# Altium PCB main.PcbDoc (part 2 of 16)
Units mil, origin at the board's own origin, x right, y up, seen from the top; angles counter-clockwise.
Board outline 8394.75 x 5164.44 mil, 7 copper layers (Top Layer 1, Layer 2, Layer 3, Unused, Layer 4_pow, Layer 5_gnd, Bottom 6+gnd), stack 64.043 mil thick; 364 components, 409 nets, 1932 pads, 1061 vias.
Unrouted connection lines stored in the file: 2.
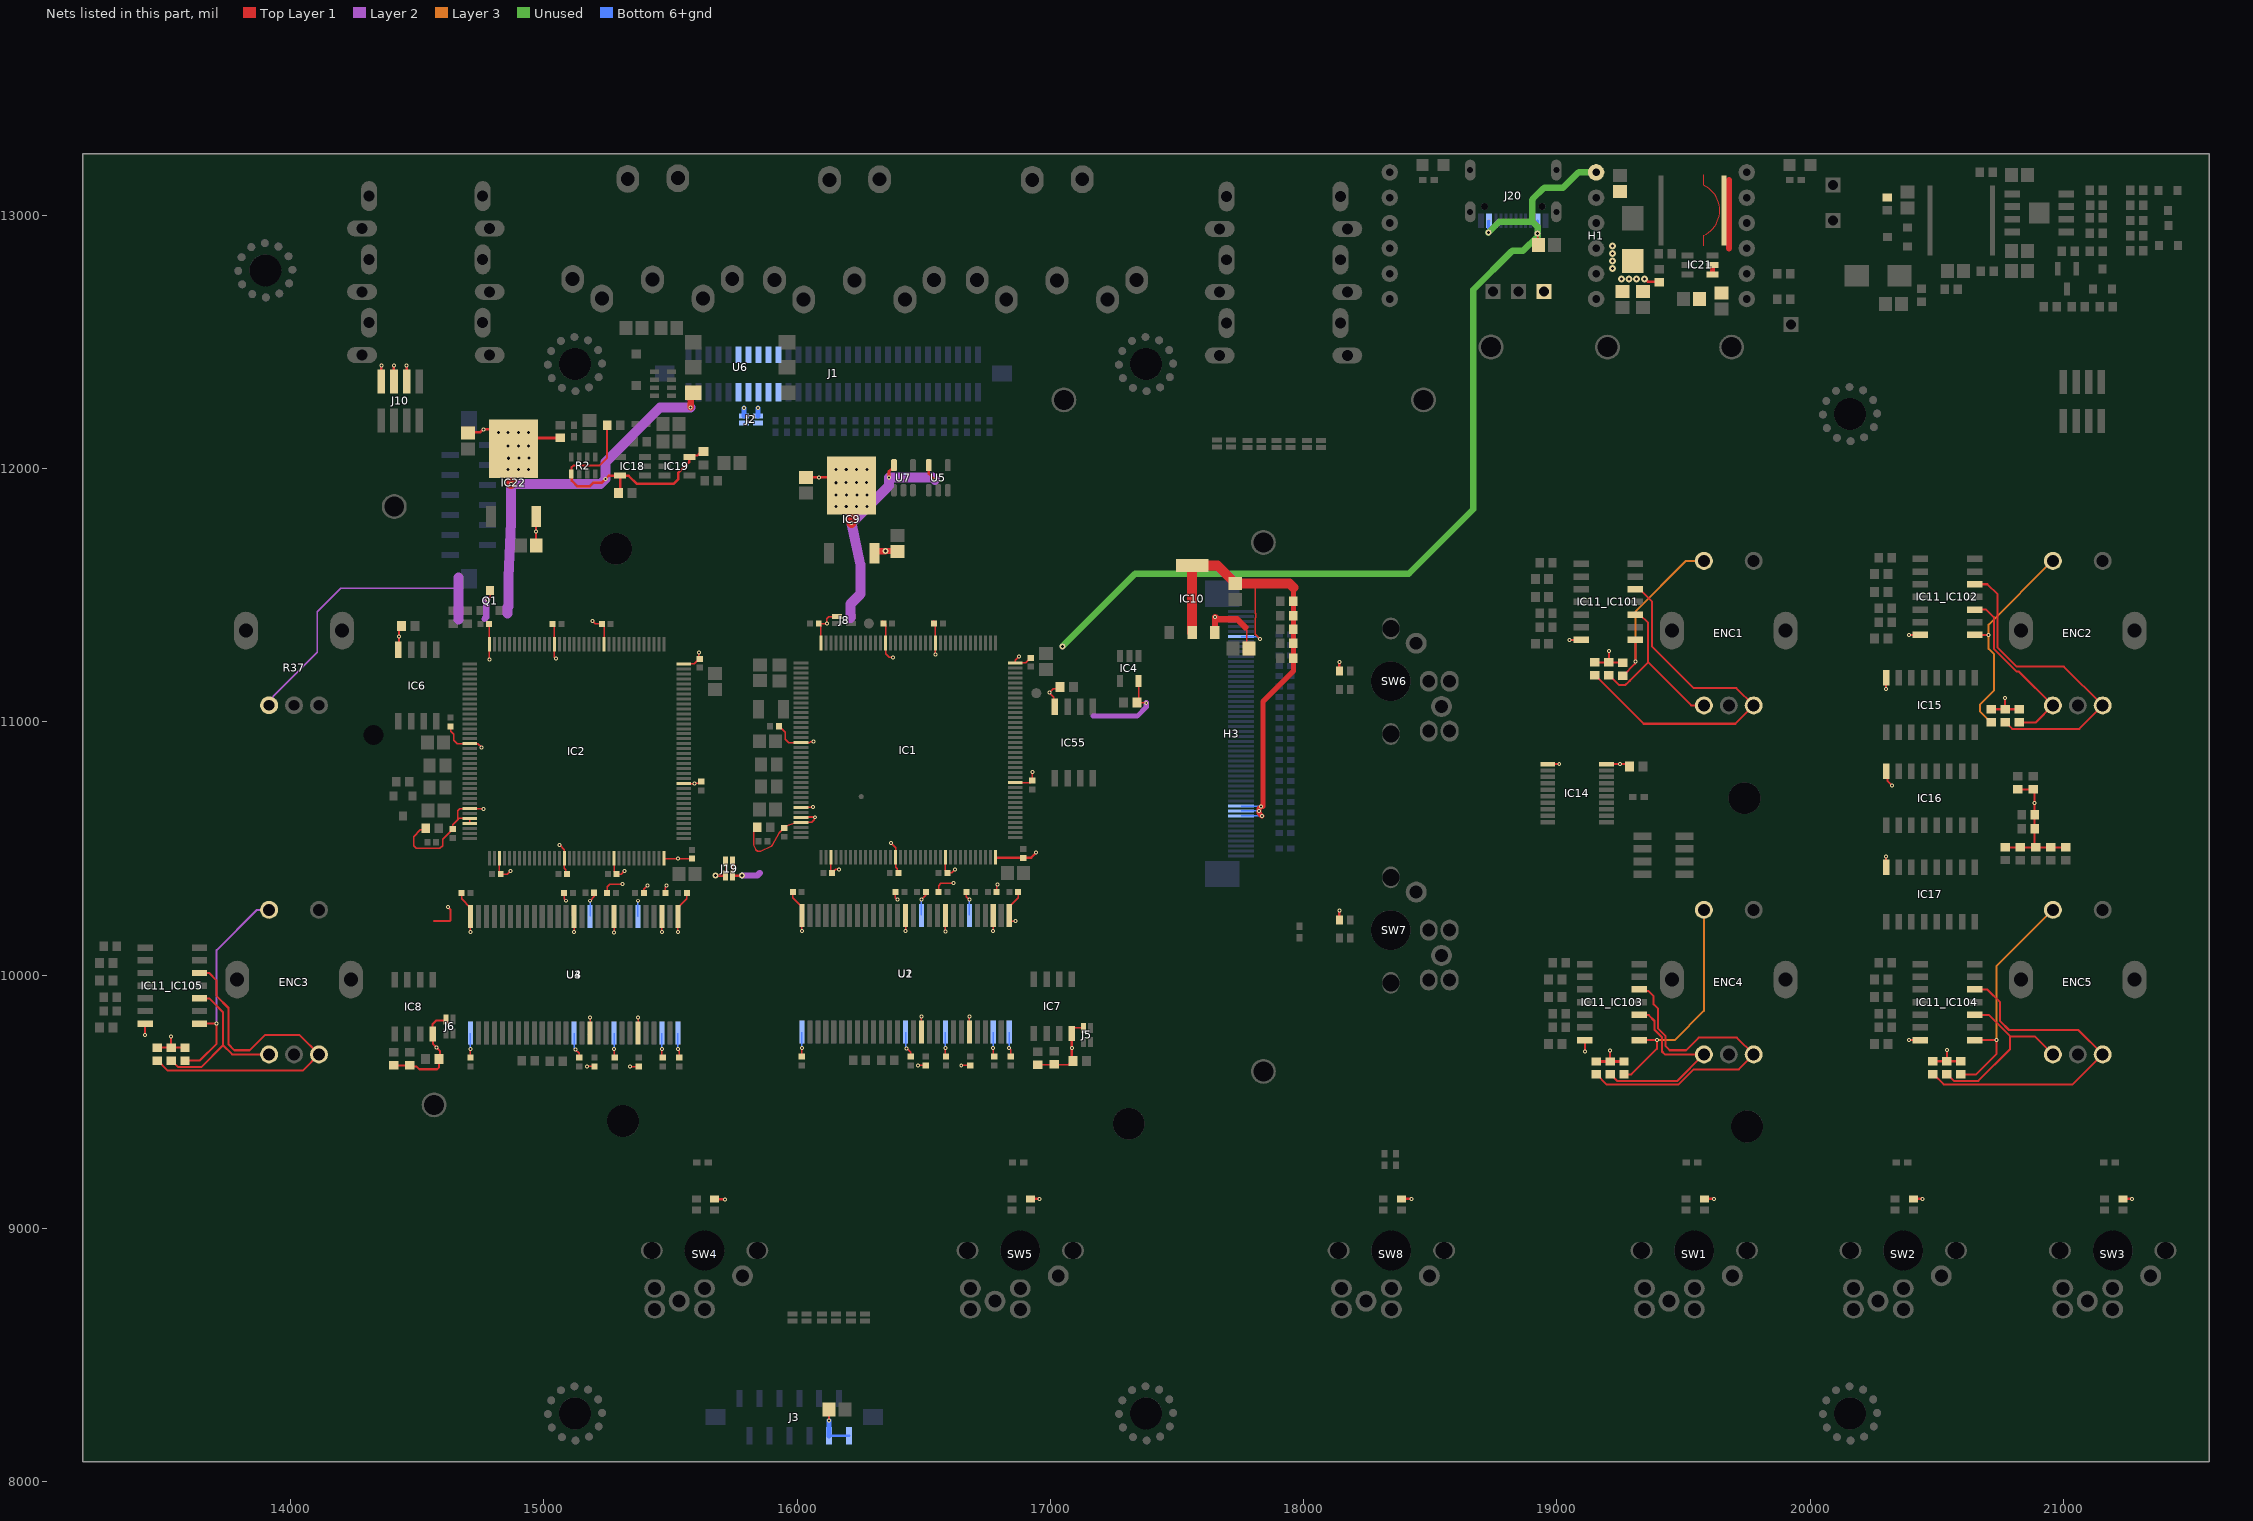
[diagram p6: the nets of this part, all layers, seen from the top]

## Part data
C1 C2 C9 C10: library part C0805C225K8RAC7800, "CAP CER 2.2UF 10V X7R 0805", Device Package="0805 (2012 Metric)", Manufacturer=KEMET, Operating Temperature="-55°C ~ 125°C", Supplier Part Number 1=399-C0805C225K8RAC7800CT-ND, Temperature Coefficient=X7R, Tolerance=±10%, Voltage - Rated=10V, Applications="Bypass, Decoupling", Capacitance="2.2 µF", ComponentLink1Description=Datasheet, ComponentLink1URL=https://api.kemet.com/component-edge/download/datasheet/C0805C225K8RACTU.pdf, ComponentLink2Description="DigiKey Link", ComponentLink2URL=https://www.digikey.com/en/products/detail/kemet/C0805C225K8RAC7800/789654, LastUpdated="3/27/2023 7:09:32 PM", Lifecycle Status=Active, Minimum Order=1, Mounting Type="Surface Mount, MLCC", Package / Case="0805 (2012 Metric)", Packaging=TapeAndReel, Part Number=C0805C225K8RAC7800, Part Status=Active, PartId=32363, Price=0.03, Series="SMD Comm X7R", Size / Dimension="0.079\" L x 0.049\" W (2.00mm x 1.25mm)", Supplier 1=DigiKey, Thickness (Max)="0.055\" (1.40mm)"
C3 C4 C5 C6: library part CBR08C909CAGAC, "CAP CER 9PF 250V C0G/NP0 0805", Device Package="0805 (2012 Metric)", Manufacturer=KEMET, Operating Temperature="-55°C ~ 125°C", Supplier Part Number 1=399-8711-1-ND, Temperature Coefficient="C0G, NP0", Tolerance=±0.25pF, Voltage - Rated=250V, Applications="RF, Microwave, High Frequency", Capacitance=9pF, ComponentLink1Description=Datasheet, ComponentLink1URL=https://api.kemet.com/component-edge/download/datasheet/CBR08C909CAGAC.pdf, ComponentLink2Description="DigiKey Link", ComponentLink2URL=http://digikey.com/product-detail/en/kemet/CBR08C909CAGAC/399-8711-1-ND/3480335, Features="High Q, Low Loss, Ultra Low ESR", LastUpdated="9/2/2020 1:04:31 AM", Lifecycle Status=Active, Minimum Order=1, Mounting Type="Surface Mount, MLCC", Package / Case="0805 (2012 Metric)", Packaging=TapeAndReel, Part Number=CBR08C909CAGAC, Part Status=Active, PartId=8592, Price=0.28, Series="CBR-SMD RF C0G", Size / Dimension="0.079\" L x 0.049\" W (2.00mm x 1.25mm)", Supplier 1=DigiKey, Thickness (Max)="0.035\" (0.88mm)"
C7 C8 C11 C12 C13 C14 C15 C16 C17 C18 C19 C20 C21 C22 C23 C24 C25 C26 C27 C28 C29 C30 C31 C32 C33 C34 C35 C36 C37 C38 C39 C40 C41 C42 C43 C44 C45 C46 C47 C48 C49 C50 C51 C52 C53 C54 C55 C56 C57 C58 C59 C60: library part C0402C104K4RACAUTO, "CAP CER 0.1UF 16V X7R 0402", Device Package="0402 (1005 Metric)", Manufacturer=KEMET, Operating Temperature="-55°C ~ 125°C", Ratings=AEC-Q200, Supplier Part Number 1=399-6828-1-ND, Temperature Coefficient=X7R, Tolerance=±10%, Voltage - Rated=16V, Applications="Automotive, Bypass, Decoupling", Capacitance=0.1µF, ComponentLink1Description=Datasheet, ComponentLink1URL=https://api.kemet.com/component-edge/download/specsheet/C0402C104K4RACAUTO.pdf, ComponentLink2Description="DigiKey Link", ComponentLink2URL=http://digikey.com/product-detail/en/kemet/C0402C104K4RACAUTO/399-6828-1-ND/3314343, LastUpdated="9/2/2020 1:02:21 AM", Lifecycle Status=Active, Minimum Order=1, Mounting Type="Surface Mount, MLCC", Package / Case="0402 (1005 Metric)", Packaging=TapeAndReel, Part Number=C0402C104K4RACAUTO, Part Status=Active, PartId=3024, Price=0.01, Series="SMD Auto X7R", Size / Dimension="0.039\" L x 0.020\" W (1.00mm x 0.50mm)", Supplier 1=DigiKey, Thickness (Max)="0.022\" (0.55mm)"
C61 C63 C64 C65 C73 C77_IC101 C77_IC102 C77_IC103 C77_IC104 C77_IC105 C78_IC101 C78_IC102 C78_IC103 C78_IC104 C78_IC105 C79_IC101 C79_IC102 C79_IC103 C79_IC104 C79_IC105 C80 C81 C86: library part C0603C104K5RAC7411, "CAP CER 0.1UF 50V X7R 0603", Device Package="0603 (1608 Metric)", Manufacturer=KEMET, Operating Temperature="-55°C ~ 125°C", Supplier Part Number 1=399-C0603C104K5RAC7411CT-ND, Temperature Coefficient=X7R, Tolerance=±10%, Voltage - Rated=50V, Applications="Bypass, Decoupling", Capacitance="0.1 µF", ComponentLink1Description=Datasheet, ComponentLink1URL=https://api.kemet.com/component-edge/download/datasheet/C0603C104K5RAC7411.pdf, ComponentLink2Description="DigiKey Link", ComponentLink2URL=https://www.digikey.com/en/products/detail/kemet/C0603C104K5RAC7411/3317013, LastUpdated="2/9/2024 8:10:30 PM", Lifecycle Status=Active, Minimum Order=1, Mounting Type="Surface Mount, MLCC", Package / Case="0603 (1608 Metric)", Packaging=TapeAndReel, Part Number=C0603C104K5RAC7411, Part Status=Active, PartId=2233, Price=0.01, Series="SMD Comm X7R", Size / Dimension="0.063\" L x 0.031\" W (1.60mm x 0.80mm)", Supplier 1=DigiKey, Thickness (Max)="0.035\" (0.90mm)"
C67 C68: library part CC0805DRNPO9BN7R0, "CAP CER 7PF 50V C0G/NPO 0805", Device Package="0805 (2012 Metric)", Manufacturer=Yageo, Operating Temperature="-55°C ~ 125°C", Supplier Part Number 1=311-1096-1-ND, Temperature Coefficient="C0G, NP0", Tolerance=±0.5pF, Voltage - Rated=50V, Applications="General Purpose", Capacitance="7 pF", ComponentLink1Description=Datasheet, ComponentLink1URL=https://www.yageo.com/upload/media/product/productsearch/datasheet/mlcc/UPY-GP_NP0_16V-to-50V_17.pdf, ComponentLink2Description="DigiKey Link", ComponentLink2URL=https://www.digikey.com/en/products/detail/yageo/CC0805DRNPO9BN7R0/302830, LastUpdated="9/8/2023 7:12:10 PM", Lifecycle Status=Active, Minimum Order=1, Mounting Type="Surface Mount, MLCC", Package / Case="0805 (2012 Metric)", Packaging=TapeAndReel, Part Number=CC0805DRNPO9BN7R0, Part Status=Active, PartId=8360, Price=0.01, Series=CC, Size / Dimension="0.079\" L x 0.049\" W (2.00mm x 1.25mm)", Supplier 1=DigiKey, Thickness (Max)="0.024\" (0.60mm)"
C69 C70 C72 C75 C76 C89: library part C0805C105K4RAC7800, "CAP CER 1UF 16V X7R 0805", Device Package="0805 (2012 Metric)", Manufacturer=KEMET, Operating Temperature="-55°C ~ 125°C", Supplier Part Number 1=399-C0805C105K4RAC7800CT-ND, Temperature Coefficient=X7R, Tolerance=±10%, Voltage - Rated=16V, Applications="Bypass, Decoupling", Capacitance="1 µF", ComponentLink1Description=Datasheet, ComponentLink1URL=https://api.kemet.com/component-edge/download/datasheet/C0805C105K4RACTU.pdf, ComponentLink2Description="DigiKey Link", ComponentLink2URL=https://www.digikey.com/en/products/detail/kemet/C0805C105K4RAC7800/416047, LastUpdated="9/19/2022 1:03:30 PM", Lifecycle Status=Active, Minimum Order=1, Mounting Type="Surface Mount, MLCC", Package / Case="0805 (2012 Metric)", Packaging=TapeAndReel, Part Number=C0805C105K4RAC7800, Part Status=Active, PartId=32075, Price=0.01, Series="SMD Comm X7R", Size / Dimension="0.079\" L x 0.049\" W (2.00mm x 1.25mm)", Supplier 1=DigiKey, Thickness (Max)="0.039\" (1.00mm)"
C71 C74 C85 C87 C88 C92 C93 C95: library part C0805C106K8PAC7800, "CAP CER 10UF 10V X5R 0805", Device Package="0805 (2012 Metric)", Manufacturer=KEMET, Operating Temperature="-55°C ~ 85°C", Supplier Part Number 1=399-C0805C106K8PAC7800CT-ND, Temperature Coefficient=X5R, Tolerance=±10%, Voltage - Rated=10V, Applications="Bypass, Decoupling", Capacitance="10 µF", ComponentLink1Description=Datasheet, ComponentLink1URL=https://connect.kemet.com:7667/gateway/IntelliData-ComponentDocumentation/1.0/download/datasheet/C0805C106K8PACTU, ComponentLink2Description="DigiKey Link", ComponentLink2URL=https://www.digikey.com/en/products/detail/kemet/C0805C106K8PAC7800/1090830, LastUpdated="9/14/2022 7:51:56 AM", Lifecycle Status=Active, Minimum Order=1, Mounting Type="Surface Mount, MLCC", Package / Case="0805 (2012 Metric)", Packaging=TapeAndReel, Part Number=C0805C106K8PAC7800, Part Status=Active, PartId=44790, Price=0.02, Series="SMD Comm X5R", Size / Dimension="0.079\" L x 0.049\" W (2.00mm x 1.25mm)", Supplier 1=DigiKey, Thickness (Max)="0.055\" (1.40mm)"
C90 C91 C94 C96 C97: library part CC0805MKX5R8BB226, "CAP CER 22UF 25V X5R 0805", Device Package="0805 (2012 Metric)", Manufacturer=Yageo, Operating Temperature="-55°C ~ 85°C", Supplier Part Number 1=311-1903-1-ND, Temperature Coefficient=X5R, Tolerance=±20%, Voltage - Rated=25V, Applications="General Purpose", Capacitance="22 µF", ComponentLink1Description=Datasheet, ComponentLink1URL=https://www.yageo.com/upload/media/product/productsearch/datasheet/mlcc/UPY-GPHC_X5R_4V-to-50V_25.pdf, ComponentLink2Description="DigiKey Link", ComponentLink2URL=https://www.digikey.com/en/products/detail/yageo/CC0805MKX5R8BB226/5195309, LastUpdated="2/9/2024 8:15:14 PM", Lifecycle Status=Active, Minimum Order=1, Mounting Type="Surface Mount, MLCC", Package / Case="0805 (2012 Metric)", Packaging=TapeAndReel, Part Number=CC0805MKX5R8BB226, Part Status=Active, PartId=39226, Price=0.09, Series=CC, Size / Dimension="0.079\" L x 0.049\" W (2.00mm x 1.25mm)", Supplier 1=DigiKey, Thickness (Max)="0.057\" (1.45mm)"
D1: "DIODE GEN PURP 100V 150MA SOD123", Capacitance @ Vr, F="2pF @ 0V, 1MHz", Current - Average Rectified (Io)=150mA, Current - Reverse Leakage @ Vr="1 µA @ 75 V", Manufacturer="Micro Commercial Co", Operating Temperature - Junction="-65°C ~ 150°C", Package / Case=SOD-123, Supplier Part Number 1=1N4148WTPMSCT-ND, Voltage - DC Reverse (Vr) (Max)="100 V", Voltage - Forward (Vf) (Max) @ If="1.25 V @ 150 mA", ComponentLink1Description=Datasheet, ComponentLink1URL=https://www.mccsemi.com/pdf/Products/1N4148W(SOD123).pdf, ComponentLink2Description="DigiKey Link", ComponentLink2URL=https://www.digikey.com/en/products/detail/micro-commercial-co/1N4148W-TP/717196, Diode Type=Standard, LastUpdated="6/3/2024 7:54:46 PM", Lifecycle Status=Active, Minimum Order=1, Mounting Type="Surface Mount", Packaging=TapeAndReel, Part Number=1N4148W-TP, Part Status=Active, PartId=999, Price=0.01, Reverse Recovery Time (trr)="4 ns", Series=-, Speed="Small Signal =< 200mA (Io), Any Speed", Supplier 1=DigiKey, Supplier Device Package=SOD-123
D2 D3: "DIODE SCHOTTKY 40V 2A DO214AA", Current - Average Rectified (Io)=2A, Current - Reverse Leakage @ Vr="400µA @ 40V", Manufacturer="ON Semiconductor", Operating Temperature - Junction="-65°C ~ 125°C", Package / Case="DO-214AA, SMB", Supplier Device Package="DO-214AA (SMB)", Supplier Part Number 1=SS24FSCT-ND, Voltage - DC Reverse (Vr) (Max)=40V, Voltage - Forward (Vf) (Max) @ If="500mV @ 2A", ComponentLink1Description=Datasheet, ComponentLink1URL=https://www.onsemi.com/pub/Collateral/SS29-D.pdf, ComponentLink2Description="DigiKey Link", ComponentLink2URL=http://digikey.com/product-detail/en/on-semiconductor/SS24/SS24FSCT-ND/1626273, Diode Type=Schottky, LastUpdated="2/8/2024 9:26:46 PM", Lifecycle Status=Active, Minimum Order=1, Mounting Type="Surface Mount", Packaging=TapeAndReel, Part Number=SS24, Part Status=Active, PartId=1394, Price=0.10, Series=-, Speed="Fast Recovery =< 500ns, > 200mA (Io)", Supplier 1=DigiKey
D4 D5: library part LSM0805412V, "LED RED CLEAR 0805 SMD", Current - Test=20mA, Device Package="0805 (2012 Metric)", Lens Color=Colorless, Manufacturer="Visual Communications Company - VCC", Millicandela Rating=100mcd, Supplier Device Package=0805, Supplier Part Number 1=28-LSM0805412VCT-ND, Voltage - Forward (Vf) (Typ)=2V, Color=Red, ComponentLink1Description=Datasheet, ComponentLink1URL=https://www.vcclite.com/wp-content/uploads/wpallimport/files/files/LSM0805452V-Green-Datasheet.pdf, ComponentLink2Description="DigiKey Link", ComponentLink2URL=https://www.digikey.com/en/products/detail/visual-communications-company-vcc/LSM0805412V/10229616, Configuration=0805, Height (Max)=0.90mm, LastUpdated="6/3/2024 8:00:06 PM", Lens Size="1.40mm x 1.20mm", Lens Style="Rectangle with Flat Top", Lens Transparency=Clear, Lifecycle Status=Active, Minimum Order=1, Mounting Type="Surface Mount", Package / Case="0805 (2012 Metric)", Packaging=TapeAndReel, Part Number=LSM0805412V, Part Status=Active, PartId=336, Price=0.11, Series=LSM0805, Size / Dimension="2.00mm L x 1.25mm W", Supplier 1=DigiKey, Viewing Angle=120°, Wavelength - Dominant=625nm, Wavelength - Peak=625nm
FB1 FB2 FB3 FB4 FB5 FB6: library part BLM21PG221SN1D, "FERRITE BEAD 220 OHM 0805 1LN", Current Rating (Max)=2A, DC Resistance (DCR) (Max)=45mOhm, Device Package="0805 (2012 Metric)", Manufacturer="Murata Electronics", Operating Temperature="-55°C ~ 125°C", Supplier Part Number 1=490-1054-1-ND, ComponentLink1Description=Datasheet, ComponentLink1URL=https://www.murata.com/en-us/products/en-us/products/productdata/8796738977822/ENFA0005.pdf, ComponentLink2Description="DigiKey Link", ComponentLink2URL=https://www.digikey.com/en/products/detail/murata-electronics/BLM21PG221SN1D/364909, Filter Type="Power Line", Height (Max)="0.041\" (1.05mm)", Impedance @ Frequency="220 Ohms @ 100 MHz", LastUpdated="6/3/2024 7:52:22 PM", Lifecycle Status=Active, Minimum Order=1, Mounting Type="Surface Mount", Number of Lines=1, Package / Case="0805 (2012 Metric)", Packaging=TapeAndReel, Part Number=BLM21PG221SN1D, Part Status=Active, PartId=1360, Price=0.02, Series="EMIFIL®, BLM21", Size / Dimension="0.079\" L x 0.049\" W (2.00mm x 1.25mm)", Supplier 1=DigiKey
IC1 IC2: "Integrated Circuit", Manufacturer_Name=STMicroelectronics, Mouser Part Number=N/A, Datasheet Link=https://componentsearchengine.com/Datasheets/1/STM32H743ZIT6U.pdf, Height=1.6mm, Manufacturer_Part_Number=STM32H743ZIT6U, Mouser Price/Stock=https://www.mouser.co.uk/ProductDetail/STMicroelectronics/STM32H743ZIT6U?qs=PzGy0jfpSMtTUBlZwwPqMQ%3D%3D
IC4 IC18 IC19: "Integrated Circuit", Manufacturer_Name="Texas Instruments", Mouser Part Number=595-SN74LVC1G125DBVR, Arrow Part Number=SN74LVC1G125DBVR, Arrow Price/Stock=https://www.arrow.com/en/products/sn74lvc1g125dbvr/texas-instruments?region=nac, Datasheet Link=http://www.ti.com/lit/ds/symlink/sn74lvc1g125.pdf, Height=1.45mm, Manufacturer_Part_Number=SN74LVC1G125DBVR, Mouser Price/Stock=https://www.mouser.co.uk/ProductDetail/Texas-Instruments/SN74LVC1G125DBVR?qs=dT9u2OTAaVWCjkJK89JQQg%3D%3D
IC6 IC55: "Integrated Circuit", Manufacturer_Name=Micron, Mouser Part Number=340-182267, Arrow Part Number=N25Q128A13ESE40F, Arrow Price/Stock=https://www.arrow.com/en/products/n25q128a13ese40f/micron-technology, Datasheet Link=https://datasheet.datasheetarchive.com/originals/distributors/Datasheets-DGA23/1494983.pdf, Height=2.16mm, Manufacturer_Part_Number=N25Q128A13ESE40F, Mouser Price/Stock=https://www.mouser.co.uk/ProductDetail/Micron/N25Q128A13ESE40F?qs=taEdVNyAfdHw8xv9Y4zfpQ%3D%3D
IC7 IC8: "Integrated Circuit", Manufacturer_Name=Microchip, Mouser Part Number=556-A24C128BNSH-B, Datasheet Link=https://componentsearchengine.com/Datasheets/1/AT24C128BN-SH-B.pdf, Height=1.75mm, Manufacturer_Part_Number=AT24C128BN-SH-B, Mouser Price/Stock=https://www.mouser.co.uk/ProductDetail/Microchip-Technology-Atmel/AT24C128BN-SH-B?qs=j6lVIf5KywAfpl9r4qbAuQ%3D%3D
IC9 IC22: "Integrated Circuit", Manufacturer_Name=STMicroelectronics, Mouser Part Number=511-LD1117DT33-TR, Arrow Part Number=LD1117DT33TR, Arrow Price/Stock=https://www.arrow.com/en/products/ld1117dt33tr/stmicroelectronics?region=nac, Datasheet Link=http://www.st.com/web/en/resource/technical/document/datasheet/CD00000544.pdf, Height=2.4mm, Manufacturer_Part_Number=LD1117DT33TR, Mouser Price/Stock=https://www.mouser.co.uk/ProductDetail/STMicroelectronics/LD1117DT33TR?qs=4JhUBQGAOSd4P5jVYGxp2g%3D%3D
IC10: "Integrated Circuit", Manufacturer_Name="Advanced Monolithic Systems", Supplier Part Number 1=C6186, Datasheet Link=http://www.advanced-monolithic.com/pdf/ds1117.pdf, Height=1.8mm, Manufacturer_Part_Number=ams1117-3.3v, Supplier 1=LCSC
IC11_IC101 IC11_IC102 IC11_IC103 IC11_IC104 IC11_IC105: "Integrated Circuit", Manufacturer_Name=onsemi, Mouser Part Number=512-74VHCT14AM, Arrow Part Number=74VHCT14AM, Arrow Price/Stock=https://www.arrow.com/en/products/74vhct14am/on-semiconductor, Datasheet Link=https://docs.rs-online.com/5e2e/0900766b812cf5b5.pdf, Height=1.75mm, Manufacturer_Part_Number=74VHCT14AM, Mouser Price/Stock=https://www.mouser.com/Search/Refine.aspx?Keyword=512-74VHCT14AM
IC14: "Integrated Circuit", Manufacturer_Name="Texas Instruments", Mouser Part Number=595-SN74HC245PWR, Arrow Part Number=SN74HC245PWR, Arrow Price/Stock=https://www.arrow.com/en/products/sn74hc245pwr/texas-instruments?region=nac, Datasheet Link=http://www.ti.com/lit/gpn/sn74hc245, Height=1.2mm, Manufacturer_Part_Number=SN74HC245PWR, Mouser Price/Stock=https://www.mouser.co.uk/ProductDetail/Texas-Instruments/SN74HC245PWR?qs=JS6RUWRH9DXHcWNikQOotA%3D%3D
IC15 IC16 IC17: "Integrated Circuit", Arrow Part Number=74HC165D(BJ), Manufacturer_Name=Toshiba, Mouser Part Number=757-74HC165DBJ, Arrow Price/Stock=https://www.arrow.com/en/products/74hc165d-bj/toshiba?region=nac, Datasheet Link=https://www.arrow.com/en/products/74hc165d-bj/toshiba?region=nac, Height=1.75mm, Manufacturer_Part_Number=74HC165D(BJ), Mouser Price/Stock=https://www.mouser.co.uk/ProductDetail/Toshiba/74HC165DBJ?qs=lQAVKuKFhkJom8fGze1o7Q%3D%3D
IC20: "MOSFET P-CH 12V 4A SOT23", Current - Continuous Drain (Id) @ 25°C="4A (Ta)", Drain to Source Voltage (Vdss)="12 V", Drive Voltage (Max Rds On,  Min Rds On)="1.8V, 4.5V", Input Capacitance (Ciss) (Max) @ Vds="1357 pF @ 10 V", Manufacturer="Diodes Incorporated", Operating Temperature="-55°C ~ 150°C (TJ)", Package / Case="TO-236-3, SC-59, SOT-23-3", Power Dissipation (Max)="800mW (Ta)", Supplier Device Package=SOT-23-3, Supplier Part Number 1=DMP1045U-7DICT-ND, ComponentLink1Description=Datasheet, ComponentLink1URL=https://www.diodes.com/assets/Datasheets/DMP1045U.pdf, ComponentLink2Description="DigiKey Link", ComponentLink2URL=https://www.digikey.com/en/products/detail/diodes-incorporated/DMP1045U-7/4249936, FET Type=P-Channel, Gate Charge (Qg) (Max) @ Vgs="15.8 nC @ 4.5 V", LastUpdated="2/8/2024 9:46:13 PM", Lifecycle Status=Active, Minimum Order=1, Mounting Type="Surface Mount", Packaging=TapeAndReel, Part Number=DMP1045U-7, Part Status=Active, Price=0.07, Rds On (Max) @ Id, Vgs="31mOhm @ 4A, 4.5V", Series=-, Supplier 1=DigiKey, Technology="MOSFET (Metal Oxide)", Vgs (Max)=±8V, Vgs(th) (Max) @ Id="1V @ 250µA"
IC21: "Integrated Circuit", Manufacturer_Name=Aerosemi, Datasheet Link=https://www.olimex.com/Products/Breadboarding/BB-PWR-3608/resources/MT3608.pdf, Height=1.45mm, Manufacturer_Part_Number=MT3608
IC23: "Integrated Circuit", Manufacturer_Name=INJOINIC, Datasheet Link=http://www.injoinic.com/wwwroot/uploads/files/20230913/623558e526750db62e25e32800f94a6b.pdf, Height=1.65mm, Manufacturer_Part_Number=IP2312
J1: "Connector", Manufacturer_Name="TE Connectivity", Mouser Part Number=571-3-1734248-0, Arrow Part Number=3-1734248-0, Arrow Price/Stock=https://www.arrow.com/en/products/3-1734248-0/te-connectivity, Datasheet Link=https://www.te.com/commerce/DocumentDelivery/DDEController?Action=srchrtrv&DocNm=5-1773461-0_Standard_FPC_Connectors_QRG&DocType=Data%20Sheet&DocLang=English&PartCntxt=3-1734248-0&DocFormat=pdf, Height=7.7mm, Manufacturer_Part_Number=3-1734248-0, Mouser Price/Stock=https://www.mouser.co.uk/ProductDetail/TE-Connectivity/3-1734248-0?qs=rVE9j%252BL6g1a4TQRjUuGYiA%3D%3D, System=Connector
J2 J5 J6 J7 J8 J9 J14 J15 J16 J17 J18 J19: library part Jumper_double, CommentText="\"Перемычка\""
J3 J4: "Connector", Manufacturer_Name=Molex, Datasheet Link=https://www.molex.com/pdm_docs/sd/528082071_sd.pdf, Height=5.3mm, Manufacturer_Part_Number=0528081271, System=Connector
J10 J11: "Connector", Manufacturer_Name="Amphenol Communications Solutions", Datasheet Link=https://cdn.amphenol-cs.com/media/wysiwyg/files/drawing/20021121.pdf, Height=4.55mm, Manufacturer_Part_Number=20021121-00008T4LF
  J10: System=Connector
J12: "Connector", Manufacturer_Name=Sullins, Datasheet Link=https://www.sullinscorp.com/drawings/88_LPPB___2NFSS-RC,_11017.pdf, Height=4.65mm, Manufacturer_Part_Number=LPPB042NFSS-RC
J20: "USB Connectors 24 Receptacle 1 8.94*7.3mm RoHS", Package=None, Availability=Unavailable, MF="{'manufacturer': u'HRO Electronics Co., Ltd.'}", MP=TYPE-C-31-M-12, Price=None
JK1 JK2 JK3: library part DIN5, "DIN5"
L1 L2: library part SRR6028-3R3Y, "FIXED IND 3.3UH 2.5A 28 MOHM SMD", Current - Saturation=2.6A, Current Rating (Amps)="2.5 A", DC Resistance (DCR)="28mOhm Max", Device Package=Nonstandard, Frequency - Self Resonant=45MHz, Inductance Frequency - Test="100 kHz", Manufacturer="Bourns Inc.", Operating Temperature="-40°C ~ 125°C", Q @ Freq="10 @ 7.96MHz", Supplier Part Number 1=118-SRR6028-3R3YCT-ND, Tolerance=±30%, ComponentLink1Description=Datasheet, ComponentLink1URL=https://www.bourns.com/docs/Product-Datasheets/SRR6028.pdf, ComponentLink2Description="DigiKey Link", ComponentLink2URL=https://www.digikey.com/en/products/detail/bourns-inc/SRR6028-3R3Y/1970369, Height - Seated (Max)="0.118\" (3.00mm)", Inductance="3.3 µH", LastUpdated="2/8/2024 9:34:55 PM", Lifecycle Status=Active, Material - Core=Ferrite, Minimum Order=1, Mounting Type="Surface Mount", Package / Case=Nonstandard, Packaging=TapeAndReel, Part Number=SRR6028-3R3Y, Part Status=Active, PartId=57, Price=0.31, Series=SRR6028, Shielding=Shielded, Size / Dimension="0.268\" L x 0.268\" W (6.80mm x 6.80mm)", Supplier 1=DigiKey, Type="Drum Core, Wirewound"
PJ1 PJ2: "6.3mm jack HOOYA"
Q1 Q2 Q4 Q5 Q6: "TRANS NPN 40V 0.2A SOT23-3", Current - Collector (Ic) (Max)="200 mA", Current - Collector Cutoff (Max)="50nA (ICBO)", DC Current Gain (hFE) (Min) @ Ic, Vce="100 @ 10mA, 1V", Frequency - Transition=300MHz, Manufacturer="Diodes Incorporated", Operating Temperature="-55°C ~ 150°C (TJ)", Package / Case="TO-236-3, SC-59, SOT-23-3", Power - Max="300 mW", Supplier Device Package=SOT-23-3, Supplier Part Number 1=MMBT3904-FDICT-ND, Voltage - Collector Emitter Breakdown (Max)="40 V", ComponentLink1Description=Datasheet, ComponentLink1URL=https://www.diodes.com/assets/Datasheets/ds30036.pdf, ComponentLink2Description="DigiKey Link", ComponentLink2URL=https://www.digikey.com/en/products/detail/diodes-incorporated/MMBT3904-7-F/814494, LastUpdated="2/8/2024 9:54:04 PM", Lifecycle Status=Active, Minimum Order=1, Mounting Type="Surface Mount", Packaging=TapeAndReel, Part Number=MMBT3904-7-F, Part Status=Active, PartId=85, Price=0.01, Series=-, Supplier 1=DigiKey, Transistor Type=NPN, Vce Saturation (Max) @ Ib, Ic="300mV @ 5mA, 50mA"
Q3: library part MMBT3906
R1 R2: "RES ARRAY 4 RES 100 OHM 1206", Manufacturer=Yageo, Number of Resistors=4, Operating Temperature="-55°C ~ 155°C", Package / Case="1206 (3216 Metric), Convex, Long Side Terminals", Power Per Element=62.5mW, Resistance (Ohms)=100, Supplier Part Number 1=YC164J-100CT-ND, Temperature Coefficient=±200ppm/°C, Tolerance=±5%, Applications="DDRAM, SDRAM", Circuit Type=Isolated, ComponentLink1Description=Datasheet, ComponentLink1URL=https://www.yageo.com/upload/media/product/productsearch/datasheet/rchip/PYu-YC_TC_group_51_RoHS_L_9.pdf, ComponentLink2Description="DigiKey Link", ComponentLink2URL=http://digikey.com/product-detail/en/yageo/YC164-JR-07100RL/YC164J-100CT-ND/1005656, Height - Seated (Max)="0.028\" (0.70mm)", LastUpdated="9/2/2020 1:23:24 AM", Lifecycle Status=Active, Minimum Order=1, Mounting Type="Surface Mount", Number of Pins=8, Packaging=TapeAndReel, Part Number=YC164-JR-07100RL, Part Status=Active, PartId=239, Price=0.01, Series=YC164, Size / Dimension="0.126\" L x 0.063\" W (3.20mm x 1.60mm)", Supplier 1=DigiKey
R3 R4 R8 R72 R73 R74 R75 R76 R77 R132 R138: library part CRCW0402100RFKEE, "RES SMD 100 OHM 1% 1/16W 0402", Device Package="0402 (1005 Metric)", Manufacturer="Vishay Dale", Operating Temperature="-55°C ~ 155°C", Power (Watts)="0.063W, 1/16W", Ratings=AEC-Q200, Supplier Device Package=0402, Supplier Part Number 1=541-2953-1-ND, Temperature Coefficient=±100ppm/°C, Tolerance=±1%, ComponentLink1Description=Datasheet, ComponentLink1URL=http://www.vishay.com/docs/20035/dcrcwe3.pdf, ComponentLink2Description="DigiKey Link", ComponentLink2URL=https://www.digikey.com/en/products/detail/vishay-dale/CRCW0402100RFKEE/5069886, Composition="Thick Film", Features="Automotive AEC-Q200", Height - Seated (Max)="0.016\" (0.40mm)", LastUpdated="2/9/2024 8:30:05 PM", Lifecycle Status=Active, Minimum Order=1, Number of Terminations=2, Package / Case="0402 (1005 Metric)", Packaging=CutTape, Part Number=CRCW0402100RFKEE, Part Status=Active, PartId=6830, Price=0.01, Resistance="100 Ohms", Series=CRCW, Size / Dimension="0.039\" L x 0.020\" W (1.00mm x 0.50mm)", Supplier 1=DigiKey
R5 R6 R7 R9 R10 R11 R12 R17 R19 R21 R38 R46 R47_IC101 R47_IC102 R47_IC103 R47_IC104 R47_IC105 R48_IC101 R48_IC102 R48_IC103 R48_IC104 R48_IC105 R49_IC101 R49_IC102 R49_IC103 R49_IC104 R49_IC105 R50 R78 R79 R80 R81 R82 R83 R84 R85 R86 R106 R107 R109 R133 R134: library part ERJ-3EKF1002V, "RES SMD 10K OHM 1% 1/10W 0603", Device Package="0603 (1608 Metric)", Manufacturer="Panasonic Electronic Components", Operating Temperature="-55°C ~ 155°C", Power (Watts)="0.1W, 1/10W", Ratings=AEC-Q200, Supplier Device Package=0603, Supplier Part Number 1=P10.0KHCT-ND, Temperature Coefficient=±100ppm/°C, Tolerance=±1%, ComponentLink1Description=Datasheet, ComponentLink1URL=https://industrial.panasonic.com/cdbs/www-data/pdf/RDA0000/AOA0000C304.pdf, ComponentLink2Description="DigiKey Link", ComponentLink2URL=https://www.digikey.com/en/products/detail/panasonic-electronic-components/ERJ-3EKF1002V/196066, Composition="Thick Film", Features="Automotive AEC-Q200", Height - Seated (Max)="0.022\" (0.55mm)", LastUpdated="2/9/2024 8:41:59 PM", Lifecycle Status=Active, Minimum Order=1, Number of Terminations=2, Package / Case="0603 (1608 Metric)", Packaging=TapeAndReel, Part Number=ERJ-3EKF1002V, Part Status=Active, PartId=25695, Price=0.01, Resistance="10 kOhms", Series=ERJ-3EK, Size / Dimension="0.063\" L x 0.031\" W (1.60mm x 0.80mm)", Supplier 1=DigiKey
R13 R14 R15 R16: library part RT0603DRE075K6L, "RES SMD 5.6K OHM 0.5% 1/10W 0603", Device Package="0603 (1608 Metric)", Manufacturer=Yageo, Operating Temperature="-55°C ~ 155°C", Power (Watts)="0.1W, 1/10W", Supplier Device Package=0603, Supplier Part Number 1=311-2635-1-ND, Temperature Coefficient=±50ppm/°C, Tolerance=±0.5%, ComponentLink1Description=Datasheet, ComponentLink1URL=https://www.yageo.com/upload/media/product/productsearch/datasheet/rchip/PYu-RT_1-to-0.01_RoHS_L_11.pdf, ComponentLink2Description="DigiKey Link", ComponentLink2URL=http://digikey.com/product-detail/en/yageo/RT0603DRE075K6L/311-2635-1-ND/6129054, Composition="Thin Film", Height - Seated (Max)="0.022\" (0.55mm)", LastUpdated="9/2/2020 1:10:05 AM", Lifecycle Status=Active, Minimum Order=1, Number of Terminations=2, Package / Case="0603 (1608 Metric)", Packaging=TapeAndReel, Part Number=RT0603DRE075K6L, Part Status=Active, PartId=14197, Price=0.01, Resistance="5.6 kOhms", Series=RT, Size / Dimension="0.063\" L x 0.031\" W (1.60mm x 0.80mm)", Supplier 1=DigiKey
R18 R135 R136: library part RCA06030000ZSEA, "RES SMD 0 OHM JUMPER 1/10W 0603", Device Package="0603 (1608 Metric)", Manufacturer="Vishay Dale", Operating Temperature="-55°C ~ 155°C", Power (Watts)="0.1W, 1/10W", Ratings=AEC-Q200, Supplier Device Package=0603, Supplier Part Number 1=541-2192-1-ND, Tolerance=Jumper, ComponentLink1Description=Datasheet, ComponentLink1URL=http://www.vishay.com/docs/20037/rcae3.pdf, ComponentLink2Description="DigiKey Link", ComponentLink2URL=http://digikey.com/product-detail/en/vishay-dale/RCA06030000ZSEA/541-2192-1-ND/4946845, Composition="Thick Film", Features="Anti-Sulfur, Automotive AEC-Q200", Height - Seated (Max)="0.020\" (0.50mm)", LastUpdated="9/2/2020 1:10:23 AM", Lifecycle Status=Active, Minimum Order=1, Number of Terminations=2, Package / Case="0603 (1608 Metric)", Packaging=TapeAndReel, Part Number=RCA06030000ZSEA, Part Status=Active, PartId=5740, Price=0.01, Series=RCA, Size / Dimension="0.061\" L x 0.033\" W (1.55mm x 0.85mm)", Supplier 1=DigiKey
R20 R52 R127: library part CRCW06031K00FKEB, "RES SMD 1K OHM 1% 1/10W 0603", Device Package="0603 (1608 Metric)", Manufacturer="Vishay Dale", Operating Temperature="-55°C ~ 155°C", Power (Watts)="0.1W, 1/10W", Ratings=AEC-Q200, Supplier Device Package=0603, Supplier Part Number 1=541-2985-1-ND, Temperature Coefficient=±100ppm/°C, Tolerance=±1%, ComponentLink1Description=Datasheet, ComponentLink1URL=http://www.vishay.com/docs/20035/dcrcwe3.pdf, ComponentLink2Description="DigiKey Link", ComponentLink2URL=https://www.digikey.com/en/products/detail/vishay-dale/CRCW06031K00FKEB/5071169, Composition="Thick Film", Features="Automotive AEC-Q200", Height - Seated (Max)="0.020\" (0.50mm)", LastUpdated="2/9/2024 8:43:36 PM", Lifecycle Status=Active, Minimum Order=1, Number of Terminations=2, Package / Case="0603 (1608 Metric)", Packaging=CutTape, Part Number=CRCW06031K00FKEB, Part Status=Active, PartId=5123, Price=0.01, Resistance="1 kOhms", Series=CRCW, Size / Dimension="0.063\" L x 0.033\" W (1.60mm x 0.85mm)", Supplier 1=DigiKey
R22 R23 R24 R25 R26 R27 R28 R29 R30 R31 R32 R33 R34 R35 R36: library part ERJ-3EKF1002V, "RES SMD 10K OHM 1% 1/10W 0603", Part Number=ERJ-3EKF1002V
R37: library part "POT 9MM 100K"
R39: library part ERJ-U03F7501V, "RES 7.5K OHM 1% 1/10W 0603 SMD", Device Package="0603 (1608 Metric)", Manufacturer="Panasonic Electronic Components", Operating Temperature="-55°C ~ 155°C", Power (Watts)="0.1W, 1/10W", Ratings=AEC-Q200, Supplier Device Package=0603, Supplier Part Number 1=10-ERJ-U03F7501VCT-ND, Temperature Coefficient=±100ppm/°C, Tolerance=±1%, ComponentLink1Description=Datasheet, ComponentLink1URL=https://industrial.panasonic.com/cdbs/www-data/pdf/RDP0000/AOA0000C334.pdf, ComponentLink2Description="DigiKey Link", ComponentLink2URL=https://www.digikey.com/en/products/detail/panasonic-electronic-components/ERJ-U03F7501V/11625704, Composition="Thick Film", Features="Anti-Sulfur, Automotive AEC-Q200", Height - Seated (Max)="0.022\" (0.55mm)", LastUpdated="2/9/2024 8:41:38 PM", Lifecycle Status=Active, Minimum Order=1, Number of Terminations=2, Package / Case="0603 (1608 Metric)", Packaging=TapeAndReel, Part Number=ERJ-U03F7501V, Part Status=Active, PartId=63936, Price=0.01, Resistance="7.5 kOhms", Series=ERJ-U03, Size / Dimension="0.063\" L x 0.031\" W (1.60mm x 0.80mm)", Supplier 1=DigiKey
R40 R41 R54 R55 R56 R57 R58 R59 R60 R61 R62 R63 R64 R65 R66 R67 R68 R69 R70 R71 R104 R137 R140 R141 R142 R143 R144 R145 R146 R147 R148 R149 R150 R151 R152 R153 R154 R155 R156 R157 R158 R159 R160: library part RMCF0402JT22R0, "RES 22 OHM 5% 1/16W 0402", Device Package="0402 (1005 Metric)", Manufacturer="Stackpole Electronics Inc", Operating Temperature="-55°C ~ 155°C", Power (Watts)="0.063W, 1/16W", Ratings=AEC-Q200, Supplier Device Package=0402, Supplier Part Number 1=RMCF0402JT22R0CT-ND, Temperature Coefficient=±100ppm/°C, Tolerance=±5%, ComponentLink1Description=Datasheet, ComponentLink1URL=https://www.seielect.com/catalog/sei-rmcf_rmcp.pdf, ComponentLink2Description="DigiKey Link", ComponentLink2URL=https://www.digikey.com/en/products/detail/stackpole-electronics-inc/RMCF0402JT22R0/1758165, Composition="Thick Film", Features="Automotive AEC-Q200", Height - Seated (Max)="0.016\" (0.40mm)", LastUpdated="2/9/2024 8:30:03 PM", Lifecycle Status=Active, Minimum Order=1, Number of Terminations=2, Package / Case="0402 (1005 Metric)", Packaging=CutTape, Part Number=RMCF0402JT22R0, Part Status=Active, PartId=7671, Price=0.01, Resistance="22 Ohms", Series=RMCF, Size / Dimension="0.039\" L x 0.020\" W (1.00mm x 0.50mm)", Supplier 1=DigiKey
R42 R43 R44 R45 R102 R103 R105 R139: library part ERJ-PA3F10R0V, "RES SMD 10 OHM 1% 1/3W 0603", Device Package="0603 (1608 Metric)", Manufacturer="Panasonic Electronic Components", Operating Temperature="-55°C ~ 155°C", Power (Watts)="0.333W, 1/3W", Ratings=AEC-Q200, Supplier Device Package=0603, Supplier Part Number 1=P10.00BYCT-ND, Temperature Coefficient=±100ppm/°C, Tolerance=±1%, ComponentLink1Description=Datasheet, ComponentLink1URL=https://industrial.panasonic.com/cdbs/www-data/pdf/RDO0000/AOA0000C331.pdf, ComponentLink2Description="DigiKey Link", ComponentLink2URL=https://www.digikey.com/en/products/detail/panasonic-electronic-components/ERJ-PA3F10R0V/5035852, Composition="Thick Film", Features="Automotive AEC-Q200, Pulse Withstanding", Height - Seated (Max)="0.022\" (0.55mm)", Lifecycle Status=Active, Minimum Order=1, Number of Terminations=2, Package / Case="0603 (1608 Metric)", Packaging=TapeAndReel, Part Number=ERJ-PA3F10R0V, Part Status=Active, PartId=5368, Price=0.01, Resistance="10 Ohms", Series=ERJ-PA3, Size / Dimension="0.063\" L x 0.031\" W (1.60mm x 0.80mm)", Supplier 1=DigiKey
  R42 R102 R103 R105 R139: LastUpdated="2/9/2024 8:43:35 PM"
  R43 R44 R45: LastUpdated="9/16/2023 7:33:50 PM"
R51: library part CRCW06032K70FKEAC, "RES 2.7K OHM 1% 1/10W 0603", Device Package="0603 (1608 Metric)", Manufacturer="Vishay Dale", Operating Temperature="-55°C ~ 155°C", Power (Watts)="0.1W, 1/10W", Supplier Device Package=0603, Supplier Part Number 1=541-5328-1-ND, Temperature Coefficient=±100ppm/°C, Tolerance=±1%, ComponentLink1Description=Datasheet, ComponentLink1URL=http://www.vishay.com/docs/28773/crcwce3.pdf, ComponentLink2Description="DigiKey Link", ComponentLink2URL=https://www.digikey.com/en/products/detail/vishay-dale/CRCW06032K70FKEAC/7924071, Composition="Thick Film", Height - Seated (Max)="0.022\" (0.55mm)", LastUpdated="2/9/2024 8:41:45 PM", Lifecycle Status=Active, Minimum Order=1, Number of Terminations=2, Package / Case="0603 (1608 Metric)", Packaging=TapeAndReel, Part Number=CRCW06032K70FKEAC, Part Status=Active, PartId=56540, Price=0.01, Resistance="2.7 kOhms", Series=CRCW-C, Size / Dimension="0.063\" L x 0.031\" W (1.60mm x 0.80mm)", Supplier 1=DigiKey
R53: library part ERJ-U03F2R00V, "RES 2 OHM 1% 1/10W 0603 SMD", Device Package="0603 (1608 Metric)", Manufacturer="Panasonic Electronic Components", Operating Temperature="-55°C ~ 155°C", Power (Watts)="0.1W, 1/10W", Ratings=AEC-Q200, Supplier Device Package=0603, Supplier Part Number 1=10-ERJ-U03F2R00VCT-ND, Temperature Coefficient="-100/ +600ppm/°C", Tolerance=±1%, ComponentLink1Description=Datasheet, ComponentLink1URL=https://industrial.panasonic.com/cdbs/www-data/pdf/RDP0000/AOA0000C334.pdf, ComponentLink2Description="DigiKey Link", ComponentLink2URL=https://www.digikey.com/en/products/detail/panasonic-electronic-components/ERJ-U03F2R00V/11636045, Composition="Thick Film", Features="Anti-Sulfur, Automotive AEC-Q200", Height - Seated (Max)="0.022\" (0.55mm)", LastUpdated="2/9/2024 8:41:34 PM", Lifecycle Status=Active, Minimum Order=1, Number of Terminations=2, Package / Case="0603 (1608 Metric)", Packaging=TapeAndReel, Part Number=ERJ-U03F2R00V, Part Status=Active, PartId=63339, Price=0.01, Resistance="2 Ohms", Series=ERJ-U03, Size / Dimension="0.063\" L x 0.031\" W (1.60mm x 0.80mm)", Supplier 1=DigiKey
R125: library part RLT0816-C-R500-FNH, "RES 0.5 OHM 1% 1/10W 0603", Device Package="0603 (1608 Metric)", Manufacturer="Delta Electronics/Cyntec", Operating Temperature="-55°C ~ 125°C", Power (Watts)="0.1W, 1/10W", Supplier Device Package=0603, Supplier Part Number 1=2037-RLT0816-C-R500-FNHCT-ND, Temperature Coefficient=±200ppm/°C, Tolerance=±1%, ComponentLink2Description="DigiKey Link", ComponentLink2URL=https://www.digikey.com/en/products/detail/delta-electronics-cyntec/RLT0816-C-R500-FNH/9762162, Composition="Thick Film", Height - Seated (Max)="0.022\" (0.55mm)", LastUpdated="2/9/2024 8:41:44 PM", Lifecycle Status=Active, Minimum Order=1, Number of Terminations=2, Package / Case="0603 (1608 Metric)", Packaging=TapeAndReel, Part Number=RLT0816-C-R500-FNH, Part Status=Active, PartId=56414, Price=0.11, Resistance="500 mOhms", Series=RLT0816, Size / Dimension="0.063\" L x 0.031\" W (1.60mm x 0.80mm)", Supplier 1=DigiKey
R126: library part CRCW06031K00FKEB, "RES SMD 1K OHM 1% 1/10W 0603", Device Package="0603 (1608 Metric)", Manufacturer="Vishay Dale", Operating Temperature="-55°C ~ 155°C", Power (Watts)="0.1W, 1/10W", Ratings=AEC-Q200, Resistance="1 kOhms", Supplier Device Package=0603, Supplier Part Number 1=541-2985-1-ND, Temperature Coefficient=±100ppm/°C, Tolerance=±1%, ComponentLink1Description=Datasheet, ComponentLink1URL=http://www.vishay.com/docs/20035/dcrcwe3.pdf, ComponentLink2Description="DigiKey Link", ComponentLink2URL=https://www.digikey.com/en/products/detail/vishay-dale/CRCW06031K00FKEB/5071169, Composition="Thick Film", Features="Automotive AEC-Q200", Height - Seated (Max)="0.020\" (0.50mm)", LastUpdated="2/9/2024 8:43:36 PM", Lifecycle Status=Active, Minimum Order=1, Number of Terminations=2, Package / Case="0603 (1608 Metric)", Packaging=CutTape, Part Number=CRCW06031K00FKEB, Part Status=Active, PartId=5123, Price=0.01, Series=CRCW, Size / Dimension="0.063\" L x 0.033\" W (1.60mm x 0.85mm)", Supplier 1=DigiKey
R128 R131: library part RMCF0603FT51K0, "RES 51K OHM 1% 1/10W 0603", Device Package="0603 (1608 Metric)", Manufacturer="Stackpole Electronics Inc", Operating Temperature="-55°C ~ 155°C", Power (Watts)="0.1W, 1/10W", Ratings=AEC-Q200, Supplier Device Package=0603, Supplier Part Number 1=RMCF0603FT51K0CT-ND, Temperature Coefficient=±100ppm/°C, Tolerance=±1%, ComponentLink1Description=Datasheet, ComponentLink1URL=https://www.seielect.com/catalog/sei-rmcf_rmcp.pdf, ComponentLink2Description="DigiKey Link", ComponentLink2URL=https://www.digikey.com/en/products/detail/stackpole-electronics-inc/RMCF0603FT51K0/1760867, Composition="Thick Film", Features="Automotive AEC-Q200", Height - Seated (Max)="0.022\" (0.55mm)", LastUpdated="2/9/2024 8:43:14 PM", Lifecycle Status=Active, Minimum Order=1, Number of Terminations=2, Package / Case="0603 (1608 Metric)", Packaging=CutTape, Part Number=RMCF0603FT51K0, Part Status=Active, PartId=10630, Price=0.01, Resistance="51 kOhms", Series=RMCF, Size / Dimension="0.061\" L x 0.031\" W (1.55mm x 0.80mm)", Supplier 1=DigiKey
R129: library part RMCF0603JG330K, "RES 330K OHM 5% 1/10W 0603", Device Package="0603 (1608 Metric)", Manufacturer="Stackpole Electronics Inc", Operating Temperature="-55°C ~ 155°C", Power (Watts)="0.1W, 1/10W", Ratings=AEC-Q200, Supplier Device Package=0603, Supplier Part Number 1=RMCF0603JG330KCT-ND, Temperature Coefficient=±200ppm/°C, Tolerance=±5%, ComponentLink1Description=Datasheet, ComponentLink1URL=https://www.seielect.com/catalog/sei-packaging.pdf, ComponentLink2Description="DigiKey Link", ComponentLink2URL=https://www.digikey.com/en/products/detail/stackpole-electronics-inc/RMCF0603JG330K/6053782, Composition="Thick Film", Features="Automotive AEC-Q200", Height - Seated (Max)="0.022\" (0.55mm)", LastUpdated="2/9/2024 8:42:36 PM", Lifecycle Status=Active, Minimum Order=1, Number of Terminations=2, Package / Case="0603 (1608 Metric)", Packaging=CutTape, Part Number=RMCF0603JG330K, Part Status=Active, PartId=20312, Price=0.01, Resistance="330 kOhms", Series=RMCF, Size / Dimension="0.061\" L x 0.031\" W (1.55mm x 0.80mm)", Supplier 1=DigiKey
R130: library part CRCW0603220KFKEAC, "RES 220K OHM 1% 1/10W 0603", Device Package="0603 (1608 Metric)", Manufacturer="Vishay Dale", Operating Temperature="-55°C ~ 155°C", Power (Watts)="0.1W, 1/10W", Supplier Device Package=0603, Supplier Part Number 1=541-4039-1-ND, Temperature Coefficient=±100ppm/°C, Tolerance=±1%, ComponentLink1Description=Datasheet, ComponentLink1URL=http://www.vishay.com/docs/28773/crcwce3.pdf, ComponentLink2Description="DigiKey Link", ComponentLink2URL=https://www.digikey.com/en/products/detail/vishay-dale/CRCW0603220KFKEAC/7928461, Composition="Thick Film", Height - Seated (Max)="0.022\" (0.55mm)", LastUpdated="2/9/2024 8:41:57 PM", Lifecycle Status=Active, Minimum Order=1, Number of Terminations=2, Package / Case="0603 (1608 Metric)", Packaging=TapeAndReel, Part Number=CRCW0603220KFKEAC, Part Status=Active, PartId=25953, Price=0.01, Resistance="220 kOhms", Series=CRCW-C, Supplier 1=DigiKey
SW1 SW2 SW3 SW4 SW5 SW6 SW7 SW8: library part Kailh_hotswap_WS2812, "Kailh keyboard switch, hotswap rgb, dual-side hotswap options + low prifile variant"
TP1 TP2 TP3 TP4 TP5 TP6 TP7 TP8 TP9 TP10 TP11 TP12 TP13 TP14 TP15 TP16: library part TestPoint
U5 U7: "1-ch, 2-input 1.65-V to 5.5-V 32 mA drive strength AND gate", Package="SOT-23-5 Texas Instruments", Check_prices=https://www.snapeda.com/parts/SN74LVC1G08DBVR/Texas+Instruments/view-part/?ref=eda, MF="Texas Instruments", MP=SN74LVC1G08DBVR, SnapEDA_Link=https://www.snapeda.com/parts/SN74LVC1G08DBVR/Texas+Instruments/view-part/?ref=snap
U6: library part H11L1SR2M, "OPTOISO 4.17KV OPN COLL 6SMD"
Y1 Y2: library part NX3225SA-24MHZ-EXS00A-CS07532, "CRYSTAL 24MHZ 9PF SMD", ESR (Equivalent Series Resistance)="100 Ohms", Load Capacitance=9pF, Manufacturer="NDK America, Inc.", Operating Mode=Fundamental, Operating Temperature="-40°C ~ 150°C", Package / Case="4-SMD, No Lead", Ratings=AEC-Q200, Supplier Part Number 1=644-1393-1-ND, ComponentLink2Description="DigiKey Link", ComponentLink2URL=http://digikey.com/product-detail/en/ndk-america-inc/NX3225SA-24MHZ-EXS00A-CS07532/644-1393-1-ND/9172121, Frequency=24MHz, Height - Seated (Max)="0.024\" (0.60mm)", LastUpdated="9/2/2020 1:21:59 AM", Lifecycle Status=Active, Minimum Order=1, Mounting Type="Surface Mount", Packaging=TapeAndReel, Part Number=NX3225SA-24MHZ-EXS00A-CS07532, Part Status=Active, PartId=571, Price=0.38, Series=NX3225SA, Size / Dimension="0.126\" L x 0.098\" W (3.20mm x 2.50mm)", Supplier 1=DigiKey, Type="MHz Crystal"
Y3: "Crystal or Oscillator", Manufacturer_Name=ABRACON, Mouser Part Number=815-ABS07-32.768K7T, Arrow Part Number=ABS07-32.768KHZ-7-T, Arrow Price/Stock=https://www.arrow.com/en/products/abs07-32.768khz-7-t/abracon?region=nac, Datasheet Link=https://abracon.com/Resonators/ABS07.pdf, Height=0.9mm, Manufacturer_Part_Number=ABS07-32.768KHZ-7-T, Mouser Price/Stock=https://www.mouser.co.uk/ProductDetail/ABRACON/ABS07-32.768KHZ-7-T?qs=2nyfZ6BV3oibNEFok2qBLA%3D%3D
H1 H2 H3 H4: System=Connector

## Free pads (board coordinates)
  round 125.98 hole 125.98 unplated: 0(13900.39,12783.41) 0(15122.88,12413.03) 0(15123,8269.72) 0(15285,11684.09) 0(15313.19,9424.09) 0(17309.34,9413.61) 0(17377.7,12413.03) 0(17378,8270) 0(19740.92,10698.88) 0(19751,9403) 0(20157.48,8269.72) 0(20157.48,12215.72)
  round 0 hole 78.74 slot 1062.99 at 90 deg: 7(14328.15,10948.82)
  round 31.5 smd: 8(13793.37,12781.23) 8(13806.62,12835.03) 8(13808.8,12728.02) 8(13845,12875) 8(13848.77,12689.64) 8(13898.22,12890.43) 8(13902.57,12676.39) 8(13952.02,12877.17) 8(13955.78,12691.82) 8(13991.98,12838.8) 8(13994.16,12731.78) 8(14007.41,12785.58) 8(15015.87,12410.85) 8(15015.98,8267.55) 8(15029.12,12464.65) 8(15029.23,8321.35) 8(15031.29,12357.63) 8(15031.41,8214.33) 8(15067.49,12504.62) 8(15067.61,8361.32) 8(15071.26,12319.26) 8(15071.37,8175.96) 8(15120.71,12520.04) 8(15120.83,8376.74) 8(15125.06,12306.01) 8(15125.17,8162.71) 8(15174.51,12506.79) 8(15174.63,8363.49) 8(15178.28,12321.43) 8(15178.39,8178.13) 8(15214.48,12468.42) 8(15214.59,8325.12) 8(15216.65,12361.4) 8(15216.77,8218.1) 8(15229.9,12415.2) 8(15230.02,8271.9) 8(17270.68,12410.85) 8(17270.98,8267.83) 8(17283.93,12464.65) 8(17284.23,8321.63) 8(17286.1,12357.63) 8(17286.41,8214.61) 8(17322.3,12504.62) 8(17322.61,8361.59) 8(17326.07,12319.26) 8(17326.37,8176.23) 8(17375.52,12520.04) 8(17375.83,8377.02) 8(17379.87,12306.01) 8(17380.17,8162.98) 8(17429.32,12506.79) 8(17429.63,8363.77) 8(17433.09,12321.43) 8(17433.39,8178.41) 8(17469.29,12468.42) 8(17469.59,8325.39) 8(17471.46,12361.4) 8(17471.77,8218.37) 8(17484.71,12415.2) 8(17485.02,8272.17) 8(20050.46,8267.55) 8(20050.46,12213.55) 8(20063.71,8321.35) 8(20063.71,12267.35) 8(20065.89,8214.33) 8(20065.89,12160.33) 8(20102.09,8361.32) 8(20102.09,12307.31) 8(20105.86,8175.96) 8(20105.86,12121.95) 8(20155.31,8376.74) 8(20155.31,12322.74) 8(20159.66,8162.71) 8(20159.66,12108.7) 8(20209.11,8363.49) 8(20209.11,12309.49) 8(20212.87,8178.13) 8(20212.87,12124.13) 8(20249.07,8325.12) 8(20249.07,12271.11) 8(20251.25,8218.1) 8(20251.25,12164.1) 8(20264.5,8271.9) 8(20264.5,12217.9)
  round 31.5 smd far side: 8(13793.37,12781.23) 8(13806.62,12835.03) 8(13808.8,12728.02) 8(13845,12875) 8(13848.77,12689.64) 8(13898.22,12890.43) 8(13902.57,12676.39) 8(13952.02,12877.17) 8(13955.78,12691.82) 8(13991.98,12838.8) 8(13994.16,12731.78) 8(14007.41,12785.58) 8(15015.87,12410.85) 8(15015.98,8267.55) 8(15029.12,12464.65) 8(15029.23,8321.35) 8(15031.29,12357.63) 8(15031.41,8214.33) 8(15067.49,12504.62) 8(15067.61,8361.32) 8(15071.26,12319.26) 8(15071.37,8175.96) 8(15120.71,12520.04) 8(15120.83,8376.74) 8(15125.06,12306.01) 8(15125.17,8162.71) 8(15174.51,12506.79) 8(15174.63,8363.49) 8(15178.28,12321.43) 8(15178.39,8178.13) 8(15214.48,12468.42) 8(15214.59,8325.12) 8(15216.65,12361.4) 8(15216.77,8218.1) 8(15229.9,12415.2) 8(15230.02,8271.9) 8(17270.68,12410.85) 8(17270.98,8267.83) 8(17283.93,12464.65) 8(17284.23,8321.63) 8(17286.1,12357.63) 8(17286.41,8214.61) 8(17322.3,12504.62) 8(17322.61,8361.59) 8(17326.07,12319.26) 8(17326.37,8176.23) 8(17375.52,12520.04) 8(17375.83,8377.02) 8(17379.87,12306.01) 8(17380.17,8162.98) 8(17429.32,12506.79) 8(17429.63,8363.77) 8(17433.09,12321.43) 8(17433.39,8178.41) 8(17469.29,12468.42) 8(17469.59,8325.39) 8(17471.46,12361.4) 8(17471.77,8218.37) 8(17484.71,12415.2) 8(17485.02,8272.17) 8(20050.46,8267.55) 8(20050.46,12213.55) 8(20063.71,8321.35) 8(20063.71,12267.35) 8(20065.89,8214.33) 8(20065.89,12160.33) 8(20102.09,8361.32) 8(20102.09,12307.31) 8(20105.86,8175.96) 8(20105.86,12121.95) 8(20155.31,8376.74) 8(20155.31,12322.74) 8(20159.66,8162.71) 8(20159.66,12108.7) 8(20209.11,8363.49) 8(20209.11,12309.49) 8(20212.87,8178.13) 8(20212.87,12124.13) 8(20249.07,8325.12) 8(20249.07,12271.11) 8(20251.25,8218.1) 8(20251.25,12164.1) 8(20264.5,8271.9) 8(20264.5,12217.9)

## Via types
v1: diameter 15.75, hole 7.87, Top Layer 1 to Bottom 6+gnd, tented both sides, 961 vias
v2: diameter 27.56, hole 11.81, Top Layer 1 to Bottom 6+gnd, 45 vias
v3: diameter 23.62/23.62/23.62/23.62/23.62/23.62/23.62 (per signal layer), hole 12, Top Layer 1 to Bottom 6+gnd, tented top, 42 vias
v4: diameter 15.75, hole 7.87, Top Layer 1 to Bottom 6+gnd, 10 vias
v5: diameter 23.62/23.62/23.62/23.62/23.62/23.62/23.62 (per signal layer), hole 12, Top Layer 1 to Bottom 6+gnd, tented bottom, 3 vias

## Nets (pads, with @x,y where several pads share a name; then routed paths per layer and width w, separated by ;. In a path a pad name is that pad's centre, name@x,y a point inside that pad or via, vN(x,y) a via of type N, cw(c..) or ccw(c..) an arc to the next point about the centre after c; other vN are vias at no path point)
3V_LCD: C74.2 H3.9 H3.10 H3.11 H3.45 IC10.2 IC10.4 R42.2 R43.2 R44.2 R45.2 R46.2 | length 2337.3
  Top Layer 1 w5: 17816.5,11546.5 17809.55,11539.55 17809.55,11428.74 17810,11428.28 17810,11411.72 17809.55,11411.26 17809.55,11346.01 v1(17828.57,11326.98) ; 17870.4,11530.71 17943.78,11530.71 17959.57,11530.71 ; R46.2@17959.75,11251.98 R42.2@17959.75,11310.32
  Top Layer 1 w20: v1(17832.19,10666.84) 17823.72,10658.37 17823.72,10640.27 v1(17834.98,10629) ; v1@17839.57,10666.84 17839.57,11080.71 17959.75,11200.89 R46.2@17959.75,11251.98 17959.57,11252.17 17959.57,11310.32 17959.57,11477.17 17959.57,11530.71
  Top Layer 1 w39.37: IC10.2@17559.57,11353.82 IC10.4@17559.57,11617.6 17659.57,11617.6 C74.2@17722.68,11554.49 ; C74.2@17730,11546.5 17816.5,11546.5 17870.4,11546.5 17943.78,11546.5 17959.57,11530.71
  Bottom 6+gnd w5: H3.45@17753.15,11337.2 17813.51,11337.2 cw(c17813.51,11332.2) 17816.55,11336.18 v1(17828.57,11326.98) ; H3.9@17753.84,10628.77 17819.9,10628.77 ccw(c17819.89,10633.78) 17819.96,10628.78 v1(17834.98,10629) ; H3.11@17753.84,10668.14 17819.9,10668.14 ccw(c17819.89,10673.15) 17819.96,10668.15 17832.87,10668.31 17832.87,10667.53 v1(17832.19,10666.84) ; H3.10@17754.13,10648.49 17801.83,10648.74 v1(17823.72,10648.74)
+5V: C70.2 C72.2 C73.2 C75.2 C76.2 C85.2 C89.2 C91.2 D3.2 IC9.3 IC10.3 IC11_IC101.14 IC11_IC102.14 IC11_IC103.14 IC11_IC104.14 IC11_IC105.14 IC14.1 IC14.20 IC15.16 IC16.16 IC17.16 IC22.3 J2.2 J2.4 J3.10 J3.12 J10.3 J10.5 J10.7 R17.2 R22.2 R23.2 R24.2 R25.2 R26.2 R27.2 R28.2 R29.2 R30.2 R31.2 R32.2 R33.2 R34.2 R35.2 R36.2 R78.2 R79.2 R80.2 R81.2 R82.2 R83.2 R84.2 R85.2 R86.2 SW1.4 SW2.4 SW3.4 SW4.4 SW5.4 SW6.4 SW7.4 SW8.4 TP13.1 | length 3084.2
  Top Layer 1 w5: 17775.06,11368.82 17775.06,11300.22 C76.2@17784.57,11290.71
  Top Layer 1 w8: v1@13425.86,9764.65 IC11_IC105.14@13425.86,9808.82 ; R31.2@13473.15,9714.41 R28.2@13528.15,9714.41 ; v1@13528.15,9758.58 R28.2@13528.15,9714.41 ; R34.2@13583.15,9714.41 R28.2@13528.15,9714.41 ; C75.2@14969.84,11696.34 v1(14969.84,11751.85) ; v1@14970,11752.01 IC22.3@14970,11796.18 ; v1@16125.3,8241.18 C85.2@16125.3,8285.36 ; IC14.1@18964.33,10833.98 v1(19009.33,10833.98) ; v1(19050.43,11323.82) IC11_IC101.14@19095.43,11323.82 ; v1@19110.43,9699.65 IC11_IC103.14@19110.43,9743.82 ; R24.2@19150,11235 R22.2@19205,11235 ; IC14.20@19195.67,10833.98 19195.75,10834.06 v1(19249.44,10834.14) ; v1(19205,11280) R22.2@19205,11235 ; R29.2@19210,9659.41 v1@19210,9703.58 ; v1(19249.44,10834.14) v1(19249.44,10834.14) ; R26.2@19260,11234.41 19259.41,11235 R22.2@19205,11235 ; C73.2@19282.01,10823.82 19282.01,10825.18 19273.21,10833.98 19249.45,10833.98 v1(19249.44,10834.14) ; IC17.16@20300,10423.82 v1@20300,10467.99 ; IC16.16@20300,10806.1 20304.83,10801.28 20304.83,10768.28 v1(20324.1,10749) ; v1@20300,11129.65 IC15.16@20300,11173.82 ; v1@20390.83,9743.82 IC11_IC104.14@20435,9743.82 ; v1@20390.83,11343.82 IC11_IC102.14@20435,11343.82 ; R30.2@20540,9660 v1@20540,9704.17 ; R86.2@20767.18,10509 R86.2@20770,10506.18 20771.14,10505.04 R85.2@20830,10505.04 R84.2@20890,10505.04 ; R25.2@20770,11050 v1@20770,11094.17 ; R79.2@20820,10733.82 R78.2@20880,10733.82 20886.18,10727.64 v1(20886.18,10680.73) R81.2@20886.18,10633.82 R80.2@20886.18,10578.82 20886.18,10508.86 R84.2@20890,10505.04 ; R82.2@21010,10505.04 R84.2@20890,10505.04